# EAGLE board NaNd_synth_v0.2 (EAGLE 6.5.0)
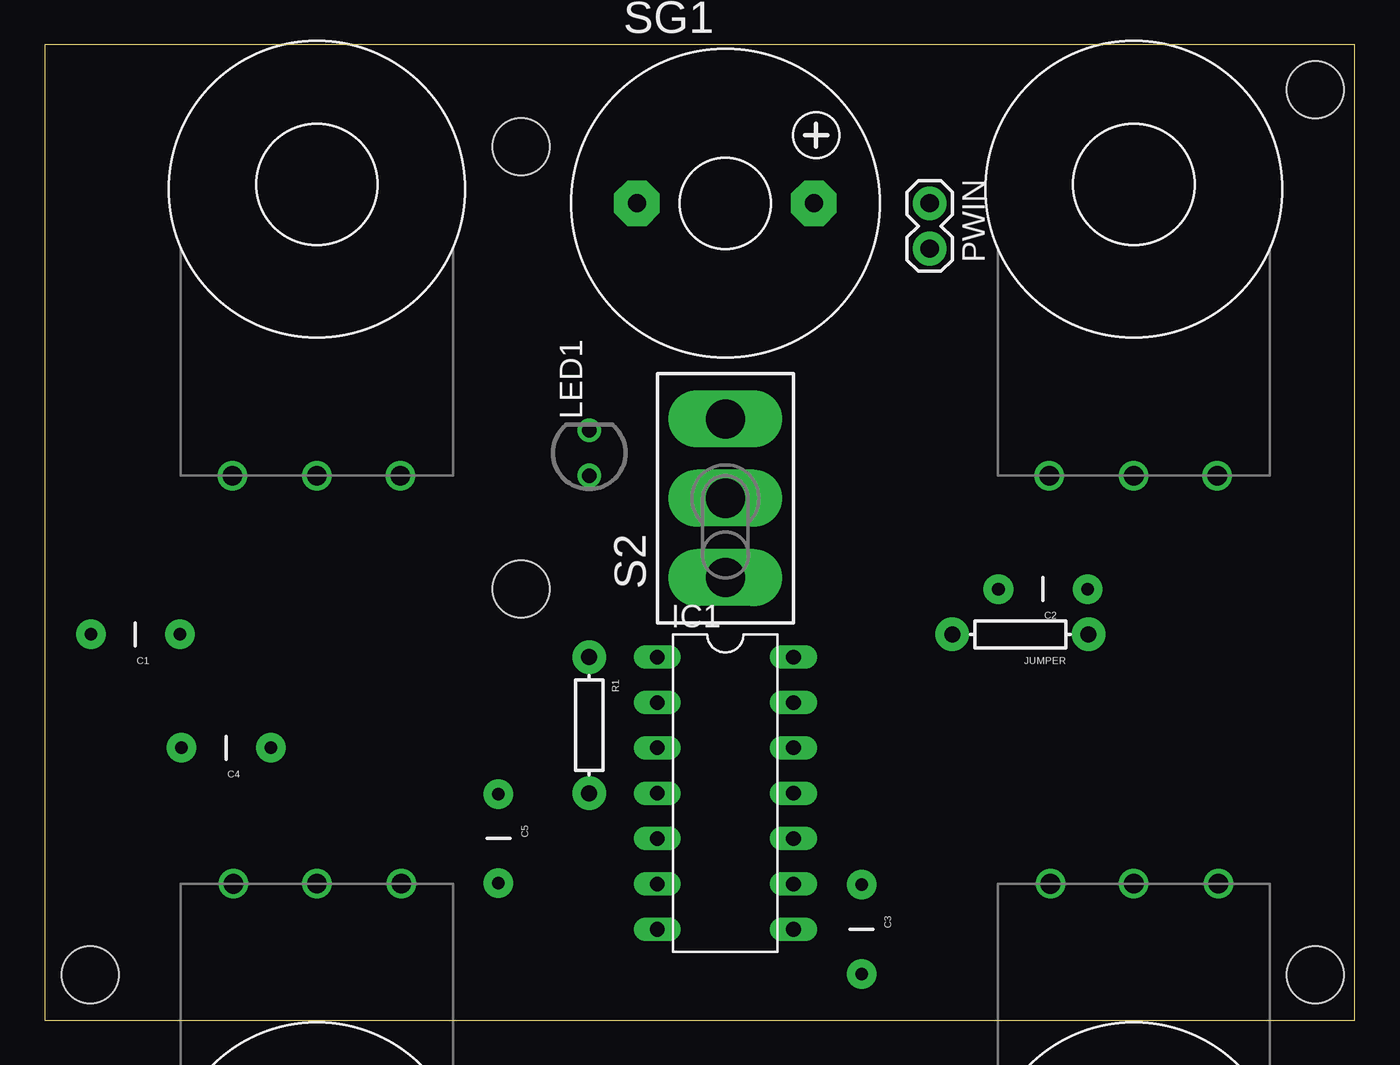
[diagram p0: board, top side]
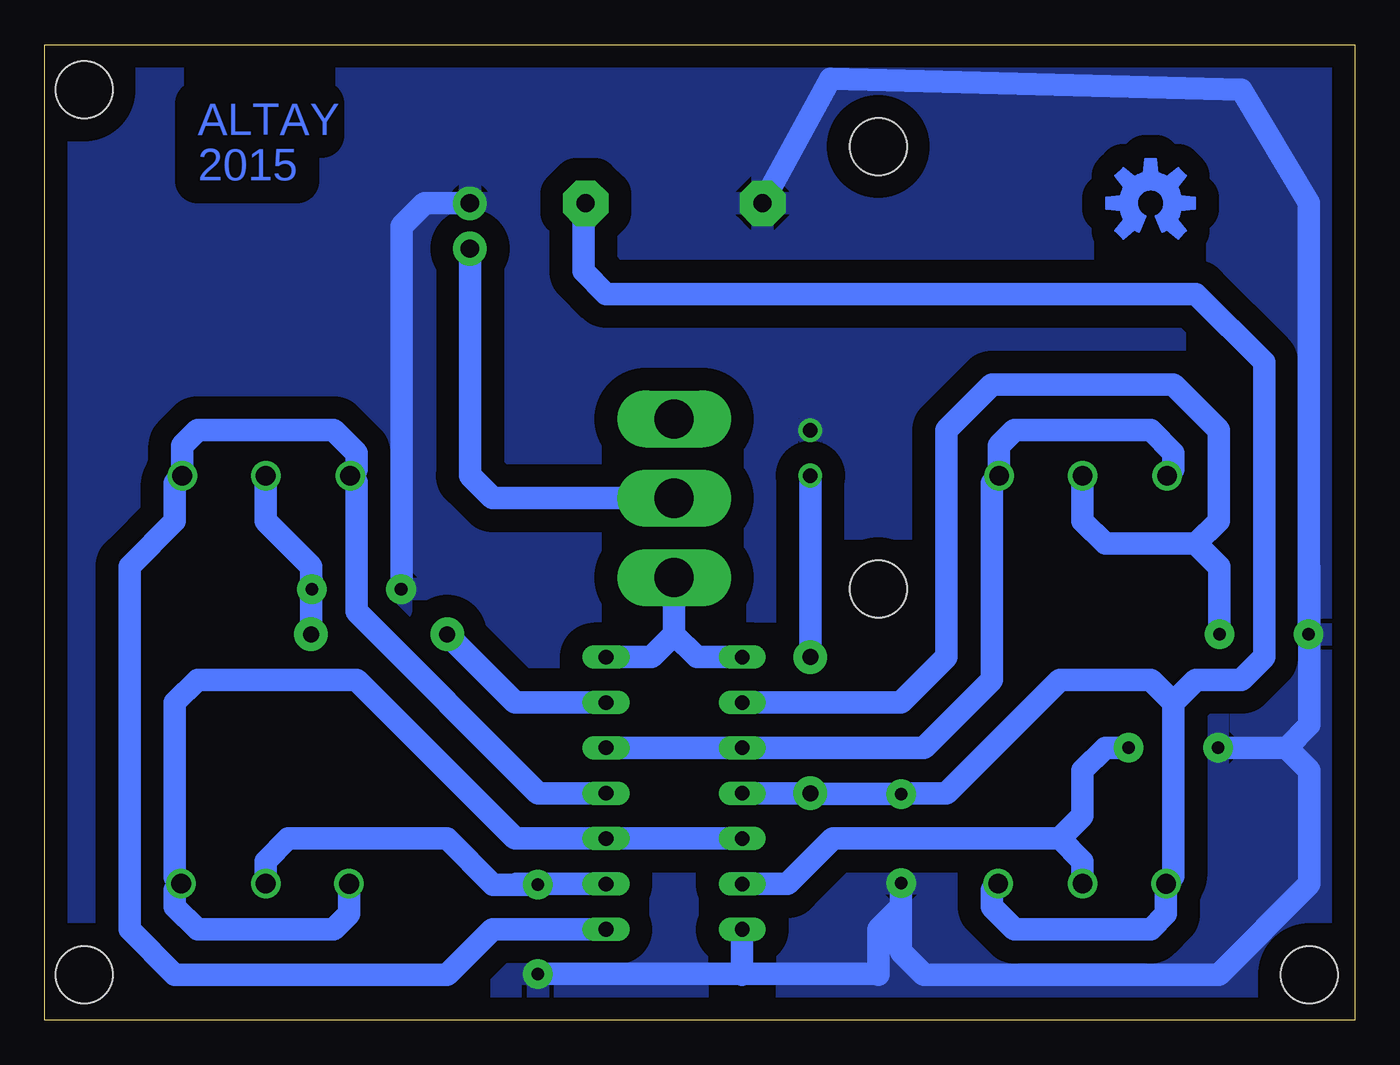
[diagram p1: board, bottom side, seen from below]

Size 73.33 x 54.6 mm. Coordinates in mm from the lower left corner, seen from the top.
Outline: 0,0 73.33,0 73.33,54.6 0,54.6 0,0
Copper layers (1*16): Top 0.035mm / dielectric 1.5mm / Bottom 0.035mm
Design rules "default": minimum track width 10mil, minimum drill 24mil, track to track 8mil, track to pad 8mil, pad to pad 8mil, via to via 8mil, smd to smd 8mil, copper to edge 40mil, drill to drill 8mil, minimum pad ring 10mil, minimum via ring 8mil, stop-mask expansion 4mil, vias tented up to drill 0mil, thermal gap 10mil
Holes 3.2 mm at 2.54,2.54 71.12,52.07 71.12,2.54 26.67,48.9 26.67,24.13

## Footprints (pad centres in the part's own frame; a part is rotated, then mirrored left to right if it is on the bottom)
CAP-PTH-5MM = drill 0.7 pad 1.651: 1 -2.5,0; 2 2.5,0
DIL14 = drill 0.813 long: 1 -7.62,-3.81; 2 -5.08,-3.81; 3 -2.54,-3.81; 4 0,-3.81; 5 2.54,-3.81; 6 5.08,-3.81; 7 7.62,-3.81; 8 7.62,3.81; 9 5.08,3.81; 10 2.54,3.81; 11 0,3.81; 12 -2.54,3.81; 13 -5.08,3.81; 14 -7.62,3.81
AXIAL-0.3 = drill 0.9 pad 1.88: P$1 -3.81,0; P$2 3.81,0
LED3MM-NS = drill 0.813: A -1.27,0; K 1.27,0
POT_MAMMOTH = drill 1.1: P$1 -4.73,-0.02; P$2 0,-0.02; P$3 4.67,-0.01
1X02 = drill 1.016 pad 1.88: 1 0,0; 2 2.54,0
TL3XPO = drill 2.184 pad 3.048 long: 1 -4.445,0; 2 0,0; 3 4.445,0
F/CM04P = drill 1.016 pad 2.54 octagon: + 4.953,0; - -4.953,0

## Placement (x,y rotation side)
C1  [CAP-PTH-5MM]  5.08,21.59 180 top
C2  [CAP-PTH-5MM]  55.88,24.13 180 top
C3  [CAP-PTH-5MM]  45.72,5.08 270 top
C4  [CAP-PTH-5MM]  10.16,15.24 180 top
C5  [CAP-PTH-5MM]  25.4,10.16 270 top
FRAME1  FRAME-LETTER  [CREATIVE_COMMONS]  20.32,-25.4 0 top  (outside the outline)
IC1  4093N  [DIL14]  38.1,12.7 270 top
JUMPER  [AXIAL-0.3]  54.61,21.59 180 top
LED1  [LED3MM-NS]  30.48,31.75 90 top
LOGO1  OSHW-LOGOM  [OSHW-LOGO-M]  11.43,45.72 0 top
POT1  [POT_MAMMOTH]  15.24,30.48 0 top
POT2  [POT_MAMMOTH]  60.96,30.48 0 top
POT3  [POT_MAMMOTH]  60.96,7.62 180 top
POT4  [POT_MAMMOTH]  15.24,7.62 180 top
PWIN  M02PTH  [1X02]  49.53,45.72 270 top
R1  [AXIAL-0.3]  30.48,16.51 270 top
S2  TL39PO  [TL3XPO]  38.1,29.21 90 top
SG1  F/CM04P  [F/CM04P]  38.1,45.72 0 top

## Library data of the parts
C1-C5 = SparkFun-Capacitors
FRAME1 = SparkFun-Aesthetics
IC1 = 40xx
JUMPER R1 = SparkFun-Resistors
LED1 = SparkFun-LED
LOGO1 = OSHW-LOGO-M-BOTTOMCOP
POT1-POT4 = SparkFun-Electromechanical
PWIN = SparkFun-Connectors
S2 = switch
SG1 = buzzer; OC_FARNELL: unknown; OC_NEWARK: unknown

## Nets
GNDMM: C1.2 C2.2 C3.2 C4.2 C5.2 LED1.K PWIN.1 SG1.-
N$1: C3.1 IC1.9 POT3.P$2
N$2: C4.1 IC1.6 POT4.P$2
N$3: LED1.A R1.P$1
N$4: PWIN.2 S2.2
N$5: IC1.1 S2.1
N$6: IC1.13 JUMPER.P$2
POTL2I: C1.1 IC1.2 POT1.P$2
POTL3I: IC1.3 IC1.12 POT1.P$1 POT1.P$3
POTL4I: IC1.8 IC1.11 POT2.P$1 POT2.P$3
POTL6I: C2.1 JUMPER.P$1 POT2.P$2
POTL10I: IC1.5 IC1.10 POT3.P$1 POT3.P$3
POTL11I: C5.1 IC1.4 POT4.P$1 POT4.P$3 R1.P$2 SG1.+
VDD: IC1.14
VSS: IC1.7

## Tracks (layer width: path | path; a pad name or v marks a point on that pad's centre or on a via)
GNDMM
  Bottom 1.27: C3.2 26.71,2.58 26.67,2.54 26.67,5.08 25.4,6.35 C5.2 25.4,3.81 24.13,2.54 7.62,2.54 2.54,7.62 2.54,13.97 3.81,15.24 | SG1.- 29.34,52.7 6.35,52.07 2.58,45.76 C1.2 2.54,25.36 2.54,16.51 3.81,15.24 | 3.81,15.24 C4.2 | C2.2 53.34,24.17 53.34,44.45 52.07,45.72 PWIN.1
  pour Bottom (isolate 1.27): 0,54.61 0,0 73.66,0 73.66,54.61
N$1
  Bottom 1.27: IC1.9 46.95,7.62 C3.1 48.22,7.58 50.8,10.16 59.69,10.16 60.96,8.89 POT3.P$2
N$2
  Bottom 1.27: POT4.P$2 15.24,8.89 16.51,10.16 | IC1.6 31.75,7.62 29.21,10.16 16.51,10.16 | 16.51,10.16 15.24,11.43 15.24,13.97 13.97,15.24 C4.1
N$3
  Bottom 1.27: R1.P$1 LED1.A
N$4
  Bottom 1.27: PWIN.2 49.53,30.48 48.26,29.21 S2.2
N$5
  Bottom 1.27: IC1.1 36.83,20.32 38.1,21.59 | 41.91,20.32 39.37,20.32 38.1,21.59 | 38.1,21.59 S2.1
N$6
  Bottom 1.27: IC1.13 46.99,17.78 JUMPER.P$2
POTL2I
  Bottom 1.27: IC1.2 25.4,17.78 22.86,20.32 22.86,33.02 20.32,35.56 10.16,35.56 7.62,33.02 7.62,27.94 8.89,26.67 | POT1.P$2 15.24,27.94 13.97,26.67 8.89,26.67 | 8.89,26.67 7.62,25.4 7.58,25.4 C1.1
POTL3I
  Bottom 1.27: POT1.P$1 10.16,30.81 10.16,31.75 11.43,33.02 19.05,33.02 19.91,32.16 POT1.P$3 20.32,30.06 20.32,19.05 24.13,15.24 IC1.3 IC1.12
POTL4I
  Bottom 1.27: IC1.11 45.72,12.7 55.88,22.86 55.88,30.11 POT2.P$1 55.88,30.81 55.88,31.75 57.15,33.02 64.77,33.02 65.63,32.16 POT2.P$3 66.04,30.06 66.04,27.94 68.58,25.4 68.58,5.08 66.04,2.54 50.8,2.54 48.26,5.08 IC1.8
POTL6I
  Bottom 1.27: JUMPER.P$1 58.42,25.36 C2.1 58.42,25.4 60.96,27.94 POT2.P$2
POTL10I
  Bottom 1.27: POT3.P$3 56.29,5.94 57.15,5.08 64.77,5.08 66.04,6.35 66.04,7.29 POT3.P$1 66.04,7.99 66.04,17.78 64.77,19.05 55.88,19.05 46.99,10.16 IC1.10 IC1.5
POTL11I
  Bottom 1.27: IC1.4 R1.P$2 30.44,12.66 C5.1 25.36,12.7 22.86,12.7 16.51,19.05 11.43,19.05 10.16,17.78 | POT4.P$1 20.32,7.29 20.32,6.35 19.05,5.08 11.43,5.08 10.57,5.94 POT4.P$3 10.16,8.04 10.16,17.78 | 10.16,17.78 8.89,19.05 6.35,19.05 5.08,20.32 5.08,36.83 8.89,40.64 41.91,40.64 43.18,41.91 43.18,45.59 SG1.+
VSS
  Bottom 1.27: IC1.7 34.29,2.54

## Text on the board
Bottom: ALTAY | 2015
tTest: Tomris